# Altium PCB CW308T_LPC55S69_MainPCB.PcbDoc
Units mil, origin at the board's own origin, x right, y up, seen from the top; angles counter-clockwise.
Board outline 2055 x 2540 mil, 2 copper layers (Top Layer, Bottom Layer); 26 components, 25 nets, 218 pads, 60 vias.
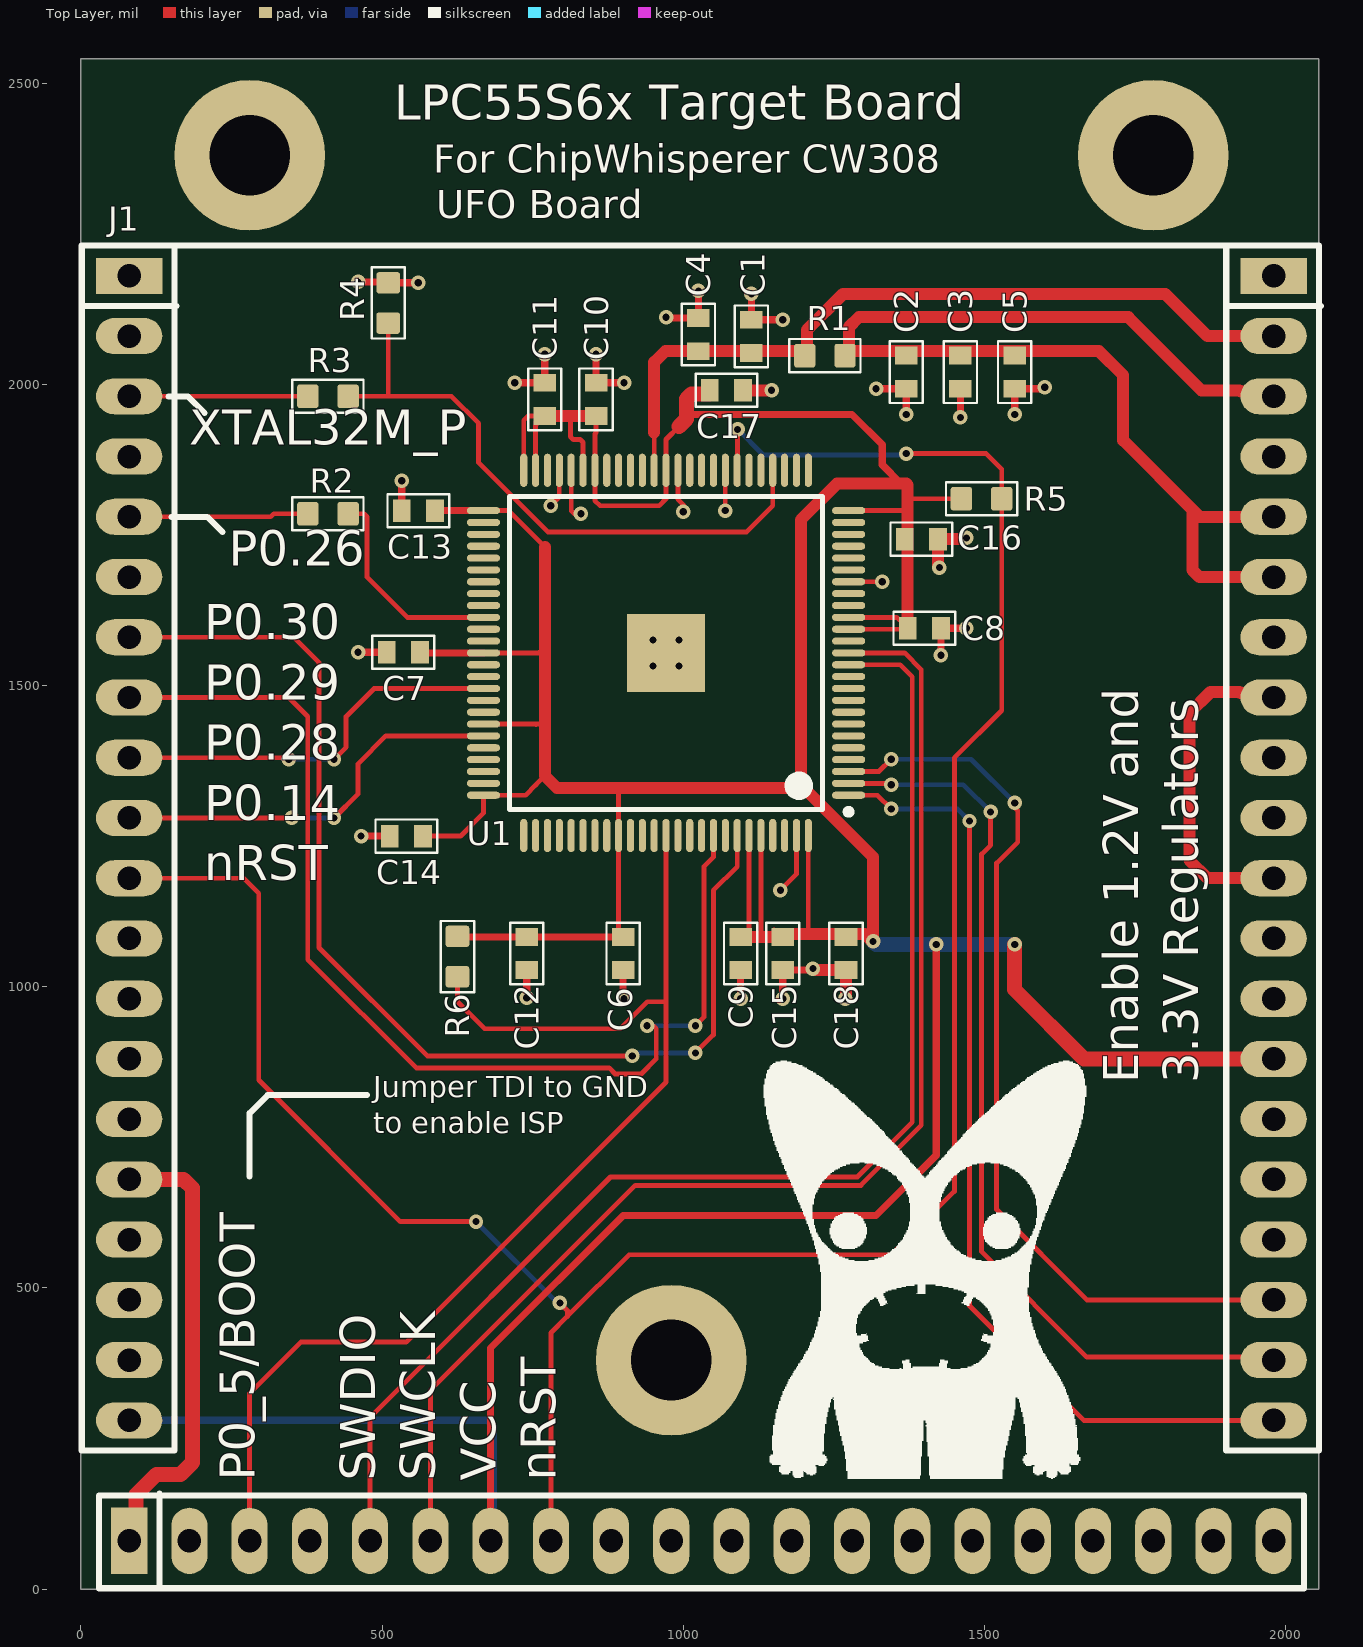
[diagram p0: Top Layer view]
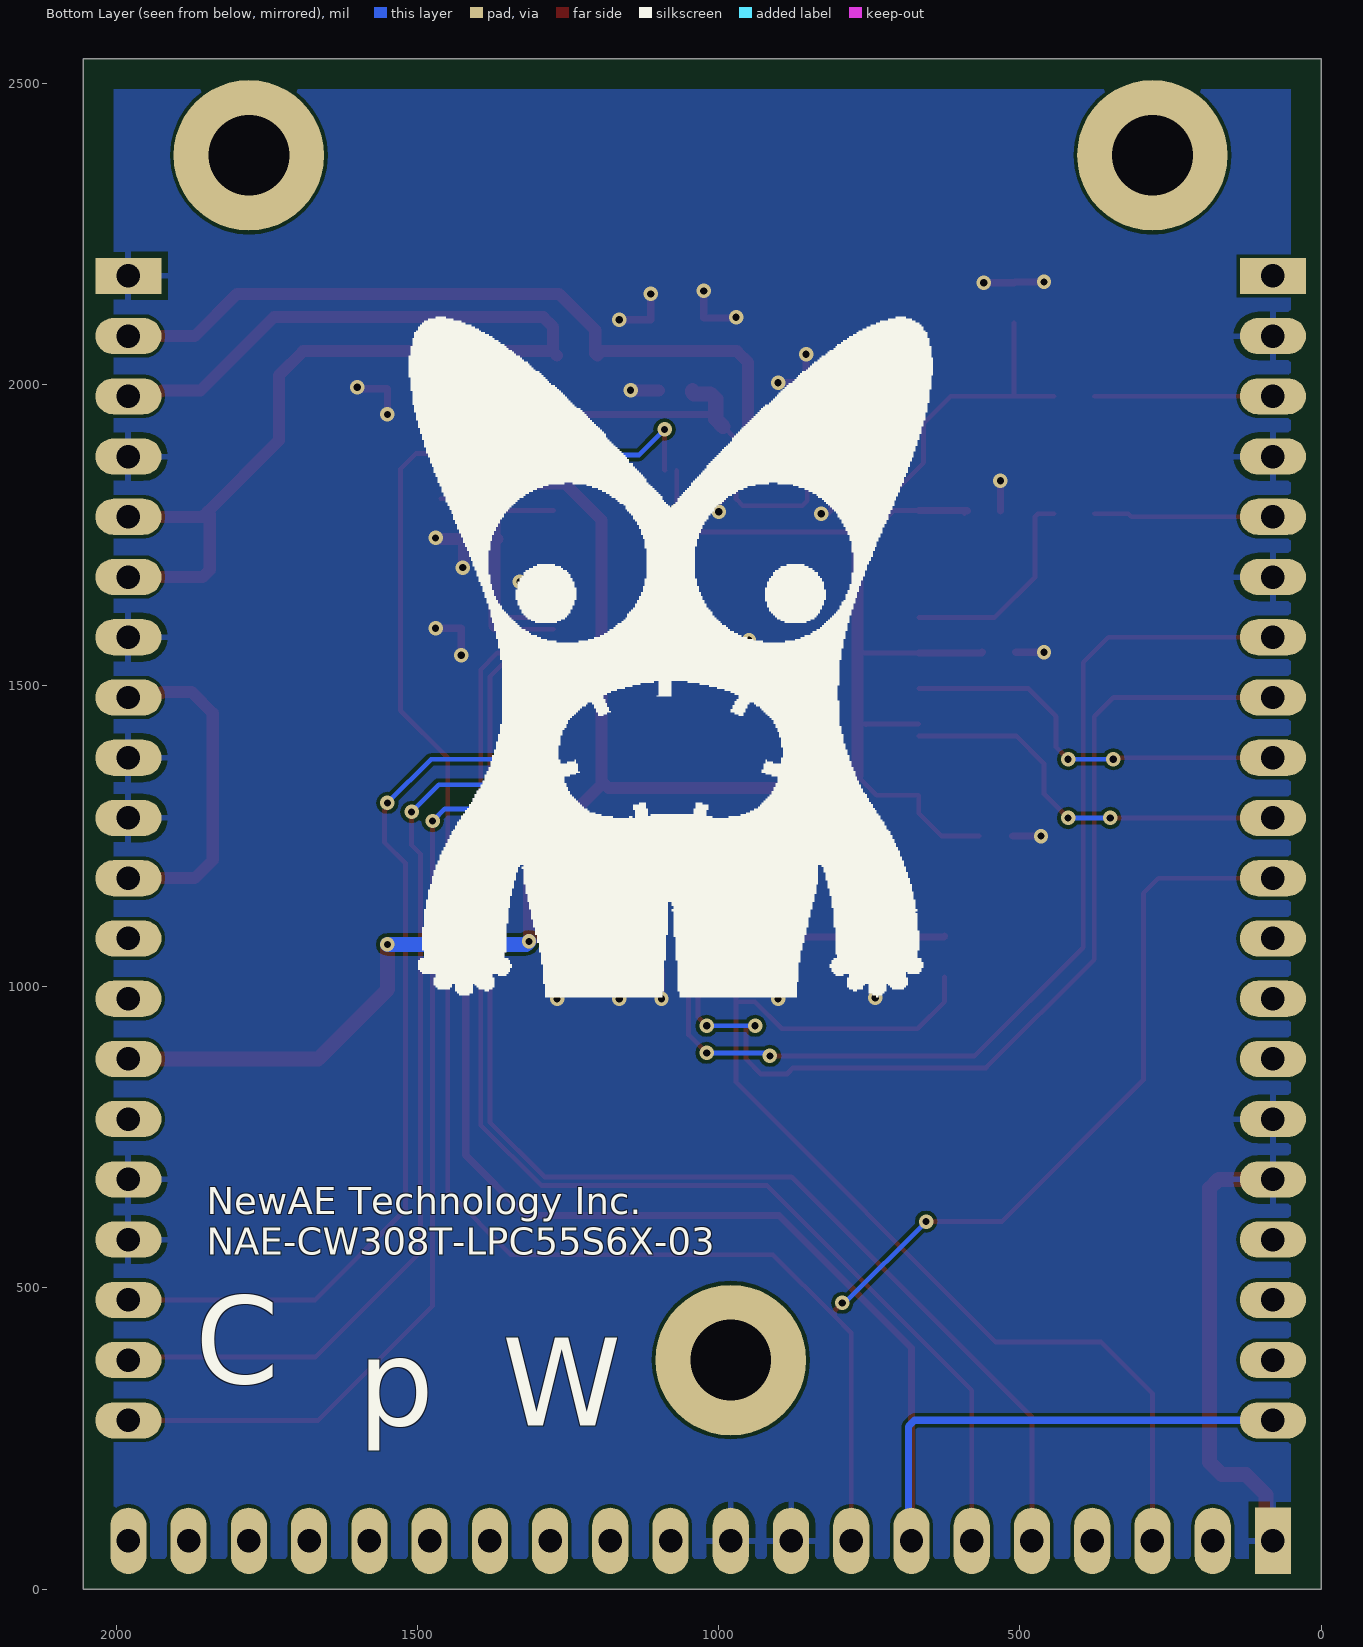
[diagram p1: Bottom Layer view, seen from below]

## Layer stack, top to bottom
Top Solder: solder mask 0.4, Solder Resist, Dk 3.5
Top Layer: signal copper 1.4
Dielectric 1: dielectric 12.6, FR-4, Dk 4.8
Bottom Layer: signal copper 1.4
Bottom Solder: solder mask 0.4, Solder Resist, Dk 3.5

## Board outline
0,0 2055,0 2055,2540 0,2540

## Design rules (kind name [scope] priority, off if disabled: settings)
BoardOutlineClearance Silk_to_Outline [(OnLayer('Top Overlay'))] p1: gap=0 ignorepadtopadclearanceinfootprint=FALSE
BoardOutlineClearance [All] p2: gap=50 ignorepadtopadclearanceinfootprint=FALSE
Clearance [All] p1: gap=6 ignorepadtopadclearanceinfootprint=FALSE except(0: Arc-Hole Track-Hole SMDPad-Hole THPad-Hole Via-Hole Fill-Hole Poly-Hole Region-Hole Text-Hole)
HoleSize [All] p1: absolutevalues=TRUE maxlimit=200 minlimit=1 maxpercent=80.000 minpercent=20.000
MinimumSolderMaskSliver [All] p1: minsoldermaskwidth=5
PlaneConnect PlaneConnect_viaDirect [IsVia] p1: planeconnectstyle=Direct reliefexpansion=20 reliefentries=4 reliefconductorwidth=10 reliefairgap=10
PlaneConnect [All] p2: planeconnectstyle=Relief reliefexpansion=20 reliefentries=4 reliefconductorwidth=10 reliefairgap=10
PolygonConnect PolygonConnect_viaDirect [All vs isVia] p1: connectstyle=Direct reliefconductorwidth=10 reliefentries=4 polygonreliefangle="90 Angle" airgapwidth=10
PolygonConnect [All] p2: connectstyle=Relief reliefconductorwidth=10 reliefentries=4 polygonreliefangle="90 Angle" airgapwidth=10
RoutingVias [All] p1: holewidth=12 width=24 viastyle="Through Hole" minholewidth=12 minwidth=24 maxholewidth=28 maxwidth=100
SilkToSilkClearance [All] p1: silktosilkclearance=5
SilkToSolderMaskClearance [IsPad] p1: minsilkscreentomaskgap=5 clearancetoexposedcopper=TRUE
SolderMaskExpansion [All] p1: expansion=4
Width [All] p1: maxlimit=100 minlimit=6 preferedwidth=8 minimp=50.000000 maximp=50.000000 favimp=50.000000
25 further rules are at their usual default settings.

## Classes and differential pairs
component class CW308T_LPC55S69_Main: J1

## Components (designator, comment, footprint, x,y, rotation, side; value= is the part's Value field where it differs from the comment)
C1 "DNM" CAPC0603_M 1112.95,2079.69 r90 top
C2 "100n" CAPC0603_M 1370,2020 r270 top
C3 "100n" CAPC0603_M 1460,2020 r270 top
C4 "DNM" CAPC0603_M 1025,2082.56 r90 top
C5 "2u2" CAPC0603_M 1550,2020 r270 top
C6 "100n" CAPC0603_M 900,1055 r270 top
C7 "100n" CAPC0603_M 535,1555 r180 top
C8 "100n" CAPC0603_M 1400,1595 r0 top
C9 "100n" CAPC0603_M 1095,1055 r270 top
C10 "100n" CAPC0603_M 855,1975 r90 top
C11 "2u2" CAPC0603_M 770,1975 r90 top
C12 "2u2" CAPC0603_M 740,1055 r270 top
C13 "2u2" CAPC0603_M 560,1790 r180 top
C14 "100n" CAPC0603_M 540,1250 r180 top
C15 "100n" CAPC0603_M 1165,1055 r270 top
C16 "100n" CAPC0603_M 1395,1742.99 r0 top
C17 "100n" CAPC0603_M 1071.46,1990 r0 top
C18 "2u2" CAPC0603_M 1270,1055 r270 top
J1 "CW308_TARGETCON" CW308_TBOARD_CONN 80,2180 r0 top locked
R1 "10R" RESC1608X55N 1235,2047.56 r0 top
R2 "22R" RESC1608X55N 410,1785 r0 top
R3 "100R" RESC1608X55N 410,1980 r180 top
R4 "51R" RESC1608X55N 510,2135 r90 top
R5 "10k" RESC1608X55N 1495,1810 r180 top
R6 "10k" RESC1608X55N 625,1050 r270 top
U1 "LPC55S69JBD100K" PG-TQFP-100-PG-NXP 971.22,1554.02 r180 top

## Footprints (in the part's own frame and the unit in brackets; to place one, negate y for a bottom-side part, rotate by r counter-clockwise, add the part's x,y. Pads: shape width x height; smd on the part's side, far side on the other; paste and mask are expansions set on the pad)
CAPC0603_M [mm]
  rect 0.75x0.95 smd: 1(-0.7,0) 2(0.7,0)
  silkscreen extent -1.3,-0.7 1.3,0.7, body extent -0.85,-0.45 0.85,0.45, height 0.9
CW308_TBOARD_CONN [mil]
  rect 110x60 hole 39: A1(0,0) C1(1900,0)
  oval 110x60 hole 39: A2(0,-100) A3(0,-200) A4(0,-300) A5(0,-400) A6(0,-500) A7(0,-600) A8(0,-700) A9(0,-800) A10(0,-900) A11(0,-1000) A12(0,-1100) A13(0,-1200) A14(0,-1300) A15(0,-1400) A16(0,-1500) A17(0,-1600) A18(0,-1700) A19(0,-1800) A20(0,-1900) C2(1900,-100) C3(1900,-200) C4(1900,-300) C5(1900,-400) C6(1900,-500) C7(1900,-600) C8(1900,-700) C9(1900,-800) C10(1900,-900) C11(1900,-1000) C12(1900,-1100) C13(1900,-1200) C14(1900,-1300) C15(1900,-1400) C16(1900,-1500) C17(1900,-1600) C18(1900,-1700) C19(1900,-1800) C20(1900,-1900)
  rect 60x110 hole 39: B1(0,-2100)
  oval 60x110 hole 39: B2(100,-2100) B3(200,-2100) B4(300,-2100) B5(400,-2100) B6(500,-2100) B7(600,-2100) B8(700,-2100) B9(800,-2100) B10(900,-2100) B11(1000,-2100) B12(1100,-2100) B13(1200,-2100) B14(1300,-2100) B15(1400,-2100) B16(1500,-2100) B17(1600,-2100) B18(1700,-2100) B19(1800,-2100) B20(1900,-2100)
  round 250 hole 134: MH1(200,200) MH2(900,-1800) MH2(1700,200)
  silkscreen extent -79,-2179 1979,50, body extent -50,-2149 1950,50, height 48
PG-TQFP-100-PG-NXP [mm] "TSQFP, 100-Leads, Body 14.00x14.00mm, Pitch 0.50mm, IPC Medium Density"
  oval 1.4x0.3 smd: 1(-7.7,6) 2(-7.7,5.5) 3(-7.7,5) 4(-7.7,4.5) 5(-7.7,4) 6(-7.7,3.5) 7(-7.7,3) 8(-7.7,2.5) 9(-7.7,2) 10(-7.7,1.5) 11(-7.7,1) 12(-7.7,0.5) 13(-7.7,0) 14(-7.7,-0.5) 15(-7.7,-1) 16(-7.7,-1.5) 17(-7.7,-2) 18(-7.7,-2.5) 19(-7.7,-3) 20(-7.7,-3.5) 21(-7.7,-4) 22(-7.7,-4.5) 23(-7.7,-5) 24(-7.7,-5.5) 25(-7.7,-6) 51(7.7,-6) 52(7.7,-5.5) 53(7.7,-5) 54(7.7,-4.5) 55(7.7,-4) 56(7.7,-3.5) 57(7.7,-3) 58(7.7,-2.5) 59(7.7,-2) 60(7.7,-1.5) 61(7.7,-1) 62(7.7,-0.5) 63(7.7,0) 64(7.7,0.5) 65(7.7,1) 66(7.7,1.5) 67(7.7,2) 68(7.7,2.5) 69(7.7,3) 70(7.7,3.5) 71(7.7,4) 72(7.7,4.5) 73(7.7,5) 74(7.7,5.5) 75(7.7,6)
  oval 0.3x1.4 smd: 26(-6,-7.7) 27(-5.5,-7.7) 28(-5,-7.7) 29(-4.5,-7.7) 30(-4,-7.7) 31(-3.5,-7.7) 32(-3,-7.7) 33(-2.5,-7.7) 34(-2,-7.7) 35(-1.5,-7.7) 36(-1,-7.7) 37(-0.5,-7.7) 38(0,-7.7) 39(0.5,-7.7) 40(1,-7.7) 41(1.5,-7.7) 42(2,-7.7) 43(2.5,-7.7) 44(3,-7.7) 45(3.5,-7.7) 46(4,-7.7) 47(4.5,-7.7) 48(5,-7.7) 49(5.5,-7.7) 50(6,-7.7) 76(6,7.7) 77(5.5,7.7) 78(5,7.7) 79(4.5,7.7) 80(4,7.7) 81(3.5,7.7) 82(3,7.7) 83(2.5,7.7) 84(2,7.7) 85(1.5,7.7) 86(1,7.7) 87(0.5,7.7) 88(0,7.7) 89(-0.5,7.7) 90(-1,7.7) 91(-1.5,7.7) 92(-2,7.7) 93(-2.5,7.7) 94(-3,7.7) 95(-3.5,7.7) 96(-4,7.7) 97(-4.5,7.7) 98(-5,7.7) 99(-5.5,7.7) 100(-6,7.7)
  rect 3.3x3.3 smd paste-10: 101(0,0)
  silkscreen extent -7.83,-6.6 6.6,6.82, body extent -8,-8 8,8, height 1.6
RESC1608X55N [mm] "Chip Resistor, Body 1.6x0.8mm, EIA 0603, IPC Medium Density"
  round 0.254 on Mech15: 0(0,0)
  rrect25% 0.9x1 smd: 1(-0.85,0) 2(0.85,0)
  Top Layer pour cut-out: -0.6,0.5 0.6,0.5 0.6,-0.5 -0.6,-0.5
  silkscreen extent -1.5,-0.7 1.5,0.7, body extent -0.87,-0.47 0.88,0.48, height 0.54

## Part data
C1 C4: library part CCHIP-DNM-0603, "DNM, 0603", Case-EIA=0603, Component Group=Capacitor, Component Type=Standard, Mounting Technology=SMT, Part Number=CCHIP-DNM-0603, Pin Count=2
C2 C3 C6 C7 C8 C9 C10 C14 C15 C16 C17: library part CCHIP-100n-0603, "100n, 0603", Case-EIA=0603, Case-Metric=1608, Manufacture 1=Kemet, Manufacture Part Number 1=C0603C104K5RACTU, Rated Voltage=50VDC, Supplier Part Number 1=399-5089-2-ND, Component Group=Capacitor, Component Type=Standard, Mounting Technology=SMT, Part Number=CCHIP-100n-0603, Pin Count=2, Supplier 1=Digi-Key
C5 C11 C12 C13 C18: library part CCHIP-2u2-0603, "2u2, 0603", Case-EIA=0603, Case-Metric=1608, Manufacture 1=Samsung, Manufacture Part Number 1=CL10B225KP8NNNC, Rated Voltage=10VDC, Supplier Part Number 1=1276-1134-2-ND, Component Group=Capacitor, Component Type=Standard, Mounting Technology=SMT, Part Number=CCHIP-2u2-0603, Pin Count=2, Supplier 1=Digi-Key
J1: library part CW308_TBOARD, "CW308 \"Standard\" Target Board Connector", Component Group=Mechanical, Component Type=Standard, Mounting Technology=Through-hole, Part Number=CW308_TBOARD, Pin Count=60, Pitch=2.54mm
R1: library part RCHIP-10R-0603, "10R res, 0603, 1%, 1/10W", Case-EIA=0603, Case-Metric=1608, Manufacture 1=Yageo, Manufacture Part Number 1=RC0603FR-0710RL, Rated Power=0.1W, Rated Voltage=75VDC, Supplier Part Number 1=311-10.0HRCT-ND, Temperature Range="-55C to 155C", Tolerance=1%, Component Group=Resistor, Component Type=Standard, Mounting Technology=SMT, Part Number=RCHIP-10R-0603, Pin Count=2, Supplier 1=Digi-Key
R2: library part RCHIP-22R-0603, "22R res, 0603, 1%, 1/10W", Case-EIA=0603, Case-Metric=1608, Manufacture 1=Yageo, Manufacture Part Number 1=RC0603FR-0722RL, Rated Power=0.1W, Rated Voltage=75VDC, Supplier Part Number 1=311-22.0HRCT-ND, Temperature Range="-55C to 155C", Tolerance=1%, Component Group=Resistor, Component Type=Standard, Mounting Technology=SMT, Part Number=RCHIP-22R-0603, Pin Count=2, Supplier 1=Digi-Key
R3: library part RCHIP-100R-0603, "100R res, 0603, 1%, 1/10W", Case-EIA=0603, Case-Metric=1608, Manufacture 1=Yageo, Manufacture Part Number 1=RC0603FR-07100RL, Rated Power=0.1W, Rated Voltage=75VDC, Supplier Part Number 1=311-100HRCT-ND, Temperature Range="-55C to 155C", Tolerance=1%, Component Group=Resistor, Component Type=Standard, Mounting Technology=SMT, Part Number=RCHIP-100R-0603, Pin Count=2, Supplier 1=Digi-Key
R4: library part RCHIP-51R-0603, "51R res, 0603, 1%, 1/10W", Case-EIA=0603, Case-Metric=1608, Manufacture 1=Yageo, Manufacture Part Number 1=RC0603FR-0751RL, Rated Power=0.1W, Rated Voltage=75VDC, Supplier Part Number 1=311-51.0HRCT-ND, Temperature Range="-55C to 155C", Tolerance=1%, Component Group=Resistor, Component Type=Standard, Mounting Technology=SMT, Part Number=RCHIP-51R-0603, Pin Count=2, Supplier 1=Digi-Key
R5 R6: library part RCHIP-10K-0603, "10k res, 0603, 1%, 1/10W", Case-EIA=0603, Case-Metric=1608, Manufacture 1=Yageo, Manufacture Part Number 1=RC0603FR-0710KL, Rated Power=0.1W, Rated Voltage=75VDC, Supplier Part Number 1=311-10.0KHRCT-ND, Temperature Range="-55C to 155C", Tolerance=1%, Component Group=Resistor, Component Type=Standard, Mounting Technology=SMT, Part Number=RCHIP-10K-0603, Pin Count=2, Supplier 1=Digi-Key
U1: "Cortex-m33, dual-core, security", Manufacture 1=NXP, Company_PN="<Enter Company P/N>", Component Group="Digital IC", Component Type=Standard, Created By=D.GODDARD, Manufacture Part Number 1=LPC55S69JBD100K, Part Number=LPC55S69JBD100K, Pin Count=101, PP Material Stack=0, PP Rotation=0

## Via types
v1: diameter 24, hole 12, Top Layer to Bottom Layer, tented both sides, 50 vias
v2: diameter 24, hole 12, Top Layer to Bottom Layer, 6 vias
v3: diameter 23.62, hole 11.81, Top Layer to Bottom Layer, tented top, 4 vias

## Nets (pads, with @x,y where several pads share a name; then routed paths per layer and width w, separated by ;. In a path a pad name is that pad's centre, name@x,y a point inside that pad or via, vN(x,y) a via of type N, cw(c..) or ccw(c..) an arc to the next point about the centre after c; other vN are vias at no path point)
BOOTMODE_TDI: J1.B3 R6.2 U1.88 | length 1984.7
  Top Layer w8: J1.B3 280,325 365,410 540,410 971.22,841.22 971.22,975 ; R6.2 625,975 670,930 895,930 940,975 971.22,975 ; U1.88 971.22,975
CLKIN: J1.A3 R3.2 | length 296.5
  Top Layer w8: J1.A3 R3.2
CLKOUT: J1.A5 R2.1 | length 298.6
  Top Layer w8: J1.A5 315,1780 320,1785 R2.1
GND: C1.2 C2.2 C3.2 C4.2 C5.2 C6.2 C7.2 C8.2 C9.2 C10.2 C11.2 C12.2 C13.2 C14.2 C15.2 C16.2 C17.2 C18.2 J1.A2 J1.A4 J1.A6 J1.A15 J1.A16 J1.B1 J1.B9 J1.B10 J1.C1 J1.C4 J1.C7 J1.C9 J1.C10 J1.C16 J1.C17 R4.2 U1.19 U1.33 U1.37 U1.46 U1.47 U1.99 U1.101 | length 2652.7
  Top Layer w8: v1(780,1798.39) 794.06,1812.44 U1.47 ; U1.46 813.74,1789.76 818.5,1785 v1(830,1785) ; U1.37 990.91,1809.09 1000,1800 v1(1000,1788.5) ; v1(1069.65,1790.31) U1.33 ; v1(1161.06,1160) 1187.76,1186.69 U1.99 ; U1.19 v1(1330,1672.13)
  Top Layer w12: v1(460,1555) C7.2 ; v1(460,2170) 508.46,2170 R4.2 v1(560,2168.46) ; v1(465,1250) C14.2 ; C13.2 v1(532.44,1840) ; v1(720,2002.56) C11.2 v1(770,2050) ; v1(740,981.5) C12.2 ; v1(855,2050) C10.2 v1(901.5,2002.56) ; C6.2 900,981.5 v1(901.5,980) ; v1(971.22,2111.38) 972.48,2110.12 C4.2 v1(1025,2155) ; v1(1095,980) C9.2 ; v1(1112.95,2150) C1.2 v1(1165,2107.24) ; v1(1165,980) C15.2 1209.19,1027.44 1211.75,1030 v1(1215,1030) v1@1215,1027.44 ; v1(1320,1992.44) C2.2 v1(1370,1950) ; v1(1427.56,1550) C8.2 v1(1470,1595) ; v1(1460,1945) C3.2 ; v1(1550,1950) C5.2 1594.19,1992.44 1596.75,1995 v1(1600,1995)
  Top Layer w20: C17.2 v1(1146.46,1990) ; v1(1215,1030) 1216.08,1030 1218.64,1027.44 C18.2 1270,981.54 v1(1268.46,980) ; v1(1425,1695.75) 1425,1696.83 1422.56,1699.27 C16.2 1466.91,1742.99 1468.92,1745 v1(1470,1745)
  Top Layer w25: J1.B1 91.52,91.52 91.52,156.52 125,190 165,190 185,210 185,665.36 170.36,680 J1.A16
  other v3: 949.57,1532.37 992.88,1532.37 949.57,1575.67 992.88,1575.67
GPIO1: J1.A7 U1.94 | length 1896.8
  Top Layer w8: J1.A7 353.27,1580 395,1538.27 395,1065 575,885 v1(915,885) ; v1(1020,890) 1049.96,919.96 1049.96,1159.88 1089.33,1199.25 U1.94
  Bottom Layer w8: v1(915,885) 919.33,885 924.33,890 v1(1020,890)
GPIO2: J1.A8 U1.92 | length 1856.5
  Top Layer w8: J1.A8 345,1480 376.54,1448.46 376.54,1045 556.54,865 876.73,865 886.73,855 930,855 955,880 955,930 950,935 v1(939.72,935) ; v1(1020,935) 1034.21,949.21 1034.21,1199.25 1049.96,1215 U1.92
  Bottom Layer w8: v1(939.72,935) v1(1020,935)
GPIO3: J1.A9 U1.66 | length 667.6
  Top Layer w8: J1.A9 342.5,1380 v1(345,1377.5) ; v1(420,1377.5) 440,1397.5 440,1448.46 486.5,1494.96 U1.66
  Bottom Layer w8: v1(345,1377.5) v1(420,1377.5)
GPIO4: J1.A10 U1.70 | length 673.8
  Top Layer w8: J1.A10 v1(350,1280) ; v1(420,1280) 460,1320 460,1370 506.22,1416.22 U1.70
  Bottom Layer w8: v1(350,1280) v1(420,1280)
LED1: J1.C18 U1.3 | length 1527.8
  Top Layer w8: U1.3 1324.67,1357.17 v2(1345,1377.5) ; v2(1550,1305) 1553.06,1301.94 1553.06,1294.25 1555,1292.31 1555,1240 1520,1205 1520,630 1670,480 J1.C18
  Bottom Layer w8: v2(1345,1377.5) 1477.5,1377.5 v2(1550,1305)
LED2: J1.C19 U1.2 | length 1551.1
  Top Layer w8: U1.2 1342.82,1337.48 v2(1345,1335.3) ; v2(1510,1290) 1510,1235 1495,1220 1495,560 1670,385 1975,385 J1.C19
  Bottom Layer w8: v2(1345,1335.3) 1464.7,1335.3 v2(1510,1290)
LED3: J1.C20 U1.1 | length 1607.1
  Top Layer w8: U1.1 1322.2,1317.8 v2(1345,1295) ; v2(1475,1275) 1475,470 1665,280 J1.C20
  Bottom Layer w8: v2(1345,1295) 1455,1295 v2(1475,1275)
NetJ1_C8: J1.C8 J1.C11 | length 554.7
  Top Layer w20: J1.C11 1870,1180 1840,1210 1840,1454.06 1875,1489.06 1923.28,1489.06 1924.69,1487.65 1972.35,1487.65 J1.C8
NetR2_2: R2.2 U1.60 | length 354.4
  Top Layer w8: R2.2 470,1785 475,1780 475,1680 541.93,1613.07 U1.60
NetR3_1: R3.1 R4.1 U1.29 | length 1034.5
  Top Layer w8: R3.1 510,1980 ; R4.1 510,1980 ; U1.29 1148.39,1798.39 1105,1755 775,1755 660,1870 660,1935 615,1980 510,1980
nRESET: J1.A11 J1.B8 R5.1 U1.32 | length 4096.1
  Top Layer w8: J1.A11 270,1180 295,1155 295,845 530,610 v1(655.75,610) ; J1.B8 780,425 807.5,452.5 ; v1(795,475) 795,474.81 807.5,462.31 807.5,452.5 ; U1.32 1090,1857.83 v1(1090,1925) ; v1(1370,1885) 1502.76,1885 1528.46,1859.29 R5.1 1528.46,1458.46 1450,1380 1450,660 1345,555 910,555 807.5,452.5
  Bottom Layer w8: v1(655.75,610) 790.75,475 v1(795,475) ; v1(1090,1925) 1132.24,1882.76 1367.76,1882.76 v1(1370,1885)
SHUNTH: C2.1 C3.1 C5.1 J1.C3 J1.C5 J1.C6 R1.2 | length 1937
  Top Layer w20: R1.2 R1.2@1275,2054.09 ; J1.C6 1856.72,1680 1845,1691.72 1845,1785 1848.5,1788.5 ; J1.C5 1857.01,1780 1848.5,1788.5 ; J1.C3 1972.35,1987.65 1925.63,1987.65 1923.28,1990 1860,1990 1738.62,2111.38 1291.38,2111.38 1275,2095 R1.2@1275,2054.09 ; R1.2@1275,2054.09 1275.91,2055 1690,2055 1730,2015 1730,1907.01 1848.5,1788.5
SHUNTL: C1.1 C4.1 J1.C2 R1.1 U1.39 | length 1312.8
  Top Layer w8: U1.39 951.54,1920
  Top Layer w20: 951.54,1920 951.54,2036.54 970,2055 C4.1 1194.09,2055 R1.1 1205,2051.02 1205,2090 1265,2150 1800,2150 1870,2080 J1.C2
SWCLK: J1.B6 U1.13 | length 2135.6
  Top Layer w8: J1.B6 580,330 920,670 1294.8,670 1395,770.2 1395,1526.44 1367.43,1554.02 U1.13
SWDIO: J1.B5 U1.12 | length 2161.2
  Top Layer w8: J1.B5 480,285 879,684 1289,684 1380,775 1380,1514.33 1360,1534.33 U1.12
SWO: U1.21
TCK: U1.83
TDO: U1.89
TMS: U1.86
TRST: U1.81
VCC: C6.1 C7.1 C8.1 C9.1 C10.1 C11.1 C12.1 C13.1 C14.1 C15.1 C16.1 C17.1 C18.1 J1.A20 J1.B7 J1.C14 R5.2 R6.1 U1.15 U1.16 U1.25 U1.38 U1.44 U1.45 U1.49 U1.50 U1.51 U1.63 U1.69 U1.75 U1.84 U1.95 U1.96 U1.100 | length 9000.1
  Top Layer w8: C14.1 630,1250 668.07,1288.07 U1.75 738.09,1317.8 755.3,1335 755.3,1335.3 770,1350 ; C13.1 C13.1@592.56,1785 ; U1.69 754.39,1435.91 ; U1.63 759.02,1554.02 760,1555 ; U1.51 709.76,1790.24 770,1730 ; U1.50 735,1940 742.44,1947.44 C11.1@766.06,1947.44 ; U1.49 754.69,1931.99 755.3,1932.6 755.3,1936.68 C11.1@766.06,1947.44 ; 755.3,1435 754.39,1435.91 ; C11.1@765,1942.44 C11.1 ; 770,1440 765.91,1435.91 754.39,1435.91 ; C11.1@780,1937.44 C11.1 ; 812.5,1947.44 812.5,1913.03 817.19,1908.34 828.74,1908.34 833.43,1903.66 U1.45 ; C10.1 855,1919.53 853.11,1917.64 U1.44 853.11,1806.89 861.69,1798.31 868.31,1798.31 868.39,1798.39 960,1798.39 971.22,1809.61 U1.38 971.22,1908.34 992.88,1930 ; 895,1330 892.48,1327.48 U1.84 892.48,1091.57 C6.1@901.5,1082.56 ; C9.1 1098.25,1082.56 1109.02,1093.32 U1.95 ; C9.1@1095,1085 C9.1@1097.2,1087.2 ; U1.96 1128.7,1083.86 1130,1082.56 ; C15.1@1150.3,1093.86 1150.3,1093.32 C15.1@1158.62,1085 ; U1.100 1207.44,1089.88 1210,1087.32 ; U1.15 C8.1@1370.83,1593.39 ; U1.16 1354.37,1613.07 1357.74,1609.7 1361.68,1609.7 1372.44,1598.94 C8.1 ; U1.25 1372.36,1790.24 1372.44,1790.31 ; C8.1@1362.95,1585.51 C8.1@1370.83,1593.39 ; C8.1@1366.18,1601.26 C8.1 ; 1372.44,1810 R5.2 ; C11.1@766.06,1947.44 C11.1 ; C15.1@1158.62,1085 1162.32,1085 1164.76,1082.56 1161.06,1082.56 C15.1@1158.62,1085 ; C8.1@1370.83,1593.39 C8.1
  Top Layer w12: C7.1 563.54,1554.02 U1.63 ; C13.1 587.8,1790.24 U1.51 ; R6.1 625.91,1082.56 C12.1 C6.1 ; J1.B7 680,400 900,620 1320,620 1420,720 v1(1420,1070) ; 1005,1960 1015,1950 1280,1950 1330,1900 1330,1866.28 1361.28,1835 1363.72,1832.56 1372.44,1832.56
  Top Layer w20: 770,1730 770,1440 770,1350 790,1330 895,1330 1183.28,1330 1195,1341.72 ; C11.1 812.5,1947.44 C10.1 ; C6.1 901.5,1082.56 C6.1@906.26,1087.32 ; C9.1@1098.25,1082.56 1130,1082.56 C15.1@1161.06,1082.56 ; C15.1@1162.32,1085 1160,1087.32 1210,1087.32 1301.59,1087.32 1313.92,1075 v1(1315,1075) 1315,1215 1195,1335 1195,1341.72 ; C15.1@1164.76,1082.56 C15.1 ; C16.1 C16.1@1372.44,1742.99 ; C8.1@1372.44,1598.94 C16.1@1372.44,1742.99 ; 1195,1341.72 1195,1775 1255,1835 1361.28,1835 1370,1835 1372.44,1832.56 1372.44,1810 1372.44,1790.31 C16.1@1372.44,1742.99
  Top Layer w25: 992.88,1930 1005,1942.12 1005,1960 1005,1975.36 1013.52,1983.88 1041.63,1983.88 1043.9,1986.14 C17.1 ; v1(1550,1070) 1550,995 1665,880 J1.C14
  Bottom Layer w12: J1.A20 675,280 685,270 685,85 J1.B7
  Bottom Layer w25: v1(1315,1075) 1320,1070 v1(1420,1070) v1(1550,1070)
pads on no net: J1.A1 J1.A12 J1.A13 J1.A14 J1.A17 J1.A18 J1.A19 J1.B2 J1.B4 J1.B11 J1.B12 J1.B13 J1.B14 J1.B15 J1.B16 J1.B17 J1.B18 J1.B19 J1.B20 J1.C12 J1.C13 J1.C15 J1.MH1 J1.MH2 R1.0 R2.0 R3.0 R4.0 R5.0 R6.0 U1.4 U1.5 U1.6 U1.7 U1.8 U1.9 U1.10 U1.11 U1.14 U1.17 U1.18 U1.20 U1.22 U1.23 U1.24 U1.26 U1.27 U1.28 U1.30 U1.31 U1.34 U1.35 U1.36 U1.40 U1.41 U1.42 U1.43 U1.48 U1.52 U1.53 U1.54 U1.55 U1.56 U1.57 U1.58 U1.59 U1.61 U1.62 U1.64 U1.65 U1.67 U1.68 U1.71 U1.72 U1.73 U1.74 U1.76 U1.77 U1.78 U1.79 U1.80 U1.82 U1.85 U1.87 U1.90 U1.91 U1.93 U1.97 U1.98

## Polygon pours and split planes (outlines as drawn)
GND on Bottom Layer "GND_L02_P000" (solid, remove dead copper, pour order 0): -160,2660 -80,2740 2310,2740 2310,-315 2220,-405 -140,-405

## Silkscreen, mask and mechanical layers (free items; w line width, h text height)
Top Overlay:
  drawing of 11 lines, arcs and shapes, not listed
  text "LPC55S6x Target Board" at 520,2420 h100
  text "For ChipWhisperer CW308" at 585,2335 h80
  text "UFO Board" at 590,2260 h80
  text "XTAL32M_P" at 180,1880.67 h100
  text "P0.26" at 245,1680 h100
  text "P0.30" at 205,1557.44 h100
  text "P0.29" at 205,1457.44 h100
  text "P0.28" at 205,1357.44 h100
  text "P0.14" at 205,1257.44 h100
  text "nRST" at 205,1157.44 h100
  text "Enable 1.2V and / 3.3V Regulators" at 1873.87,840 h100 r90
  text "Jumper TDI to GND / to enable ISP" at 485,745 h60
  text "P0_5/BOOT" at 307.56,180 h100 r90
  text "SWDIO" at 507.56,180 h100 r90
  text "SWCLK" at 607.56,180 h100 r90
  text "VCC" at 707.56,180 h100 r90
  text "nRST" at 807.56,180 h100 r90
Bottom Overlay:
  drawing of 3 lines, arcs and shapes, not listed
  text "NewAE Technology Inc. / NAE-CW308T-LPC55S6X-03" at 1850,555 h45
  text "C" at 1869,293 h250
  text "W" at 1359,223 h250
  text "p" at 1599,223 h250
Mechanical 1:
  the board outline again, w20